# Altium PCB PCB1.PcbDoc
Units mm, origin at the board's own origin, x right, y up, seen from the top; angles counter-clockwise.
Board outline 80.1 x 60.2 mm, 2 copper layers (Top Layer, Bottom Layer); 47 components, 37 nets, 167 pads, 23 vias.
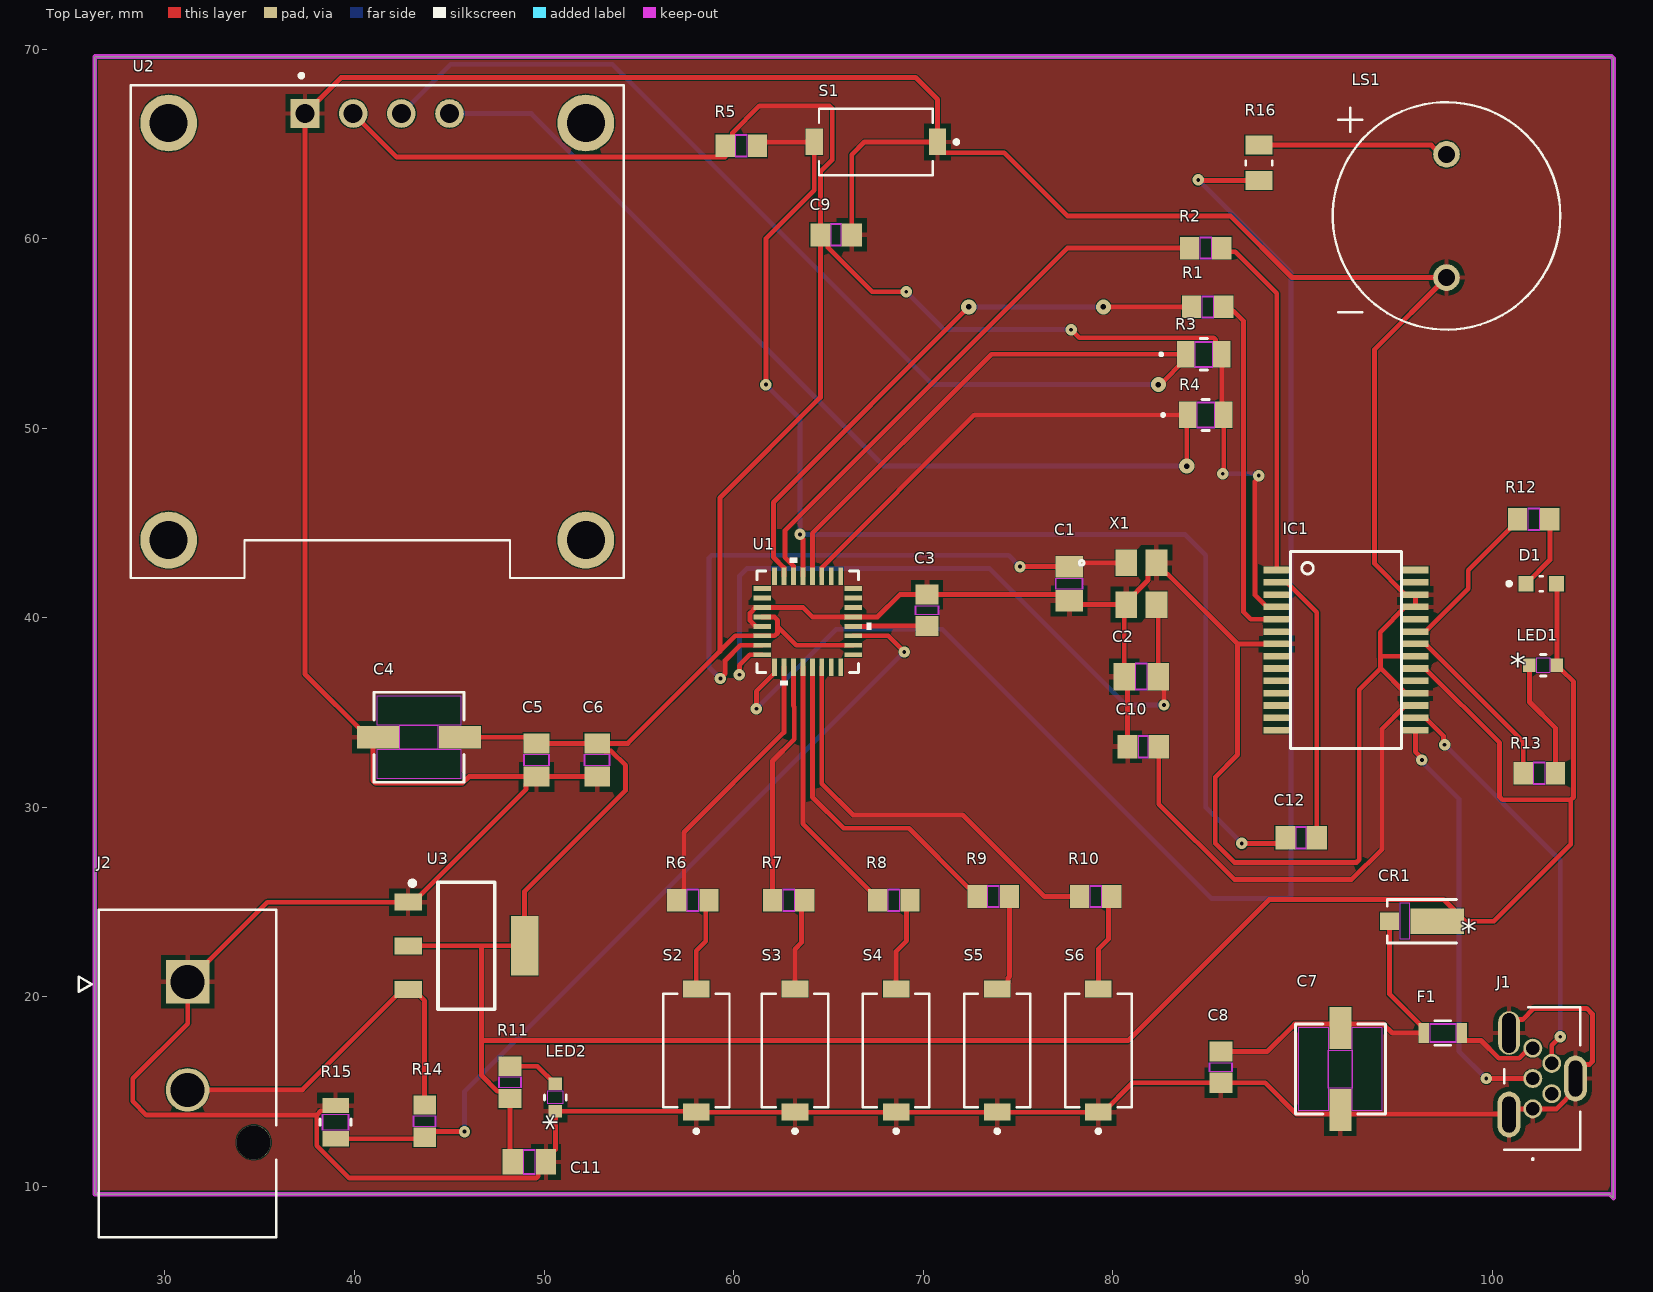
[diagram p0: Top Layer view]
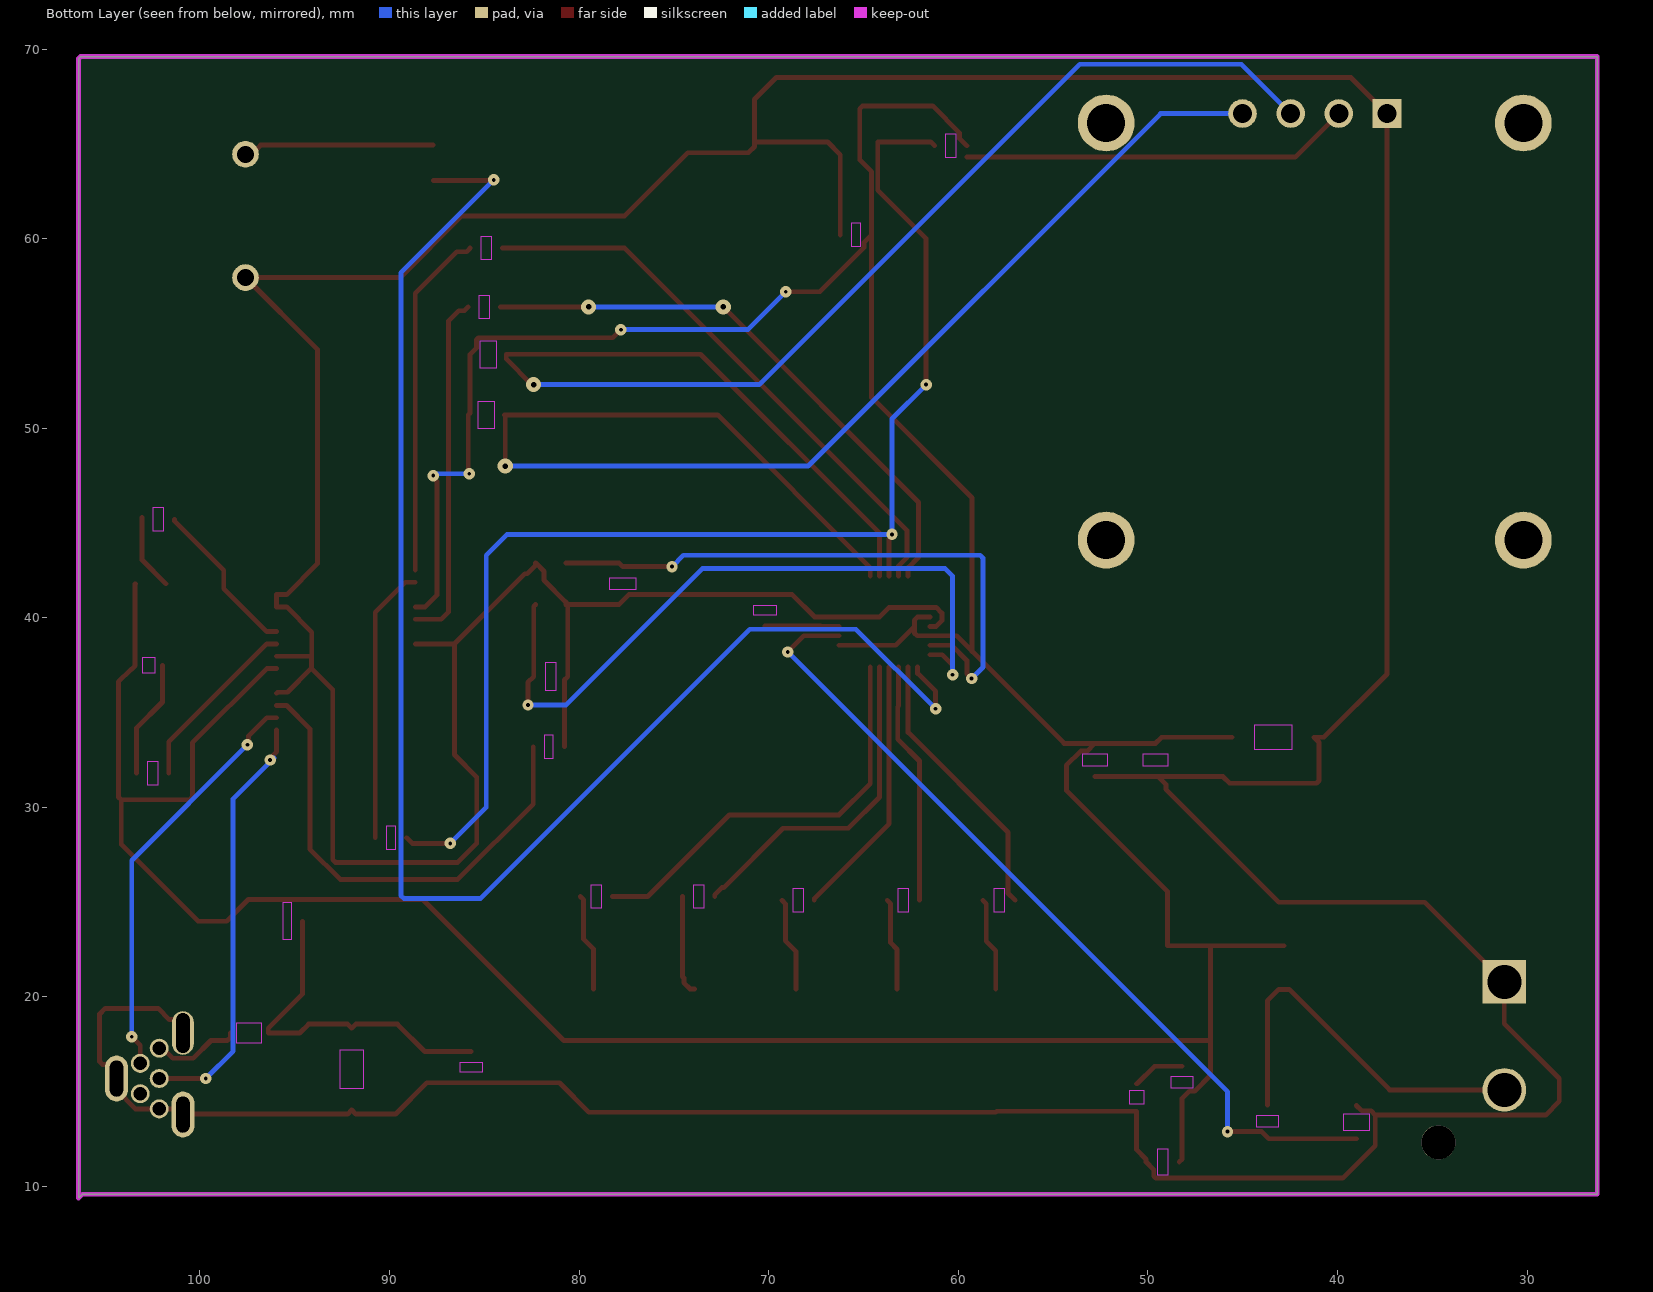
[diagram p1: Bottom Layer view, seen from below]
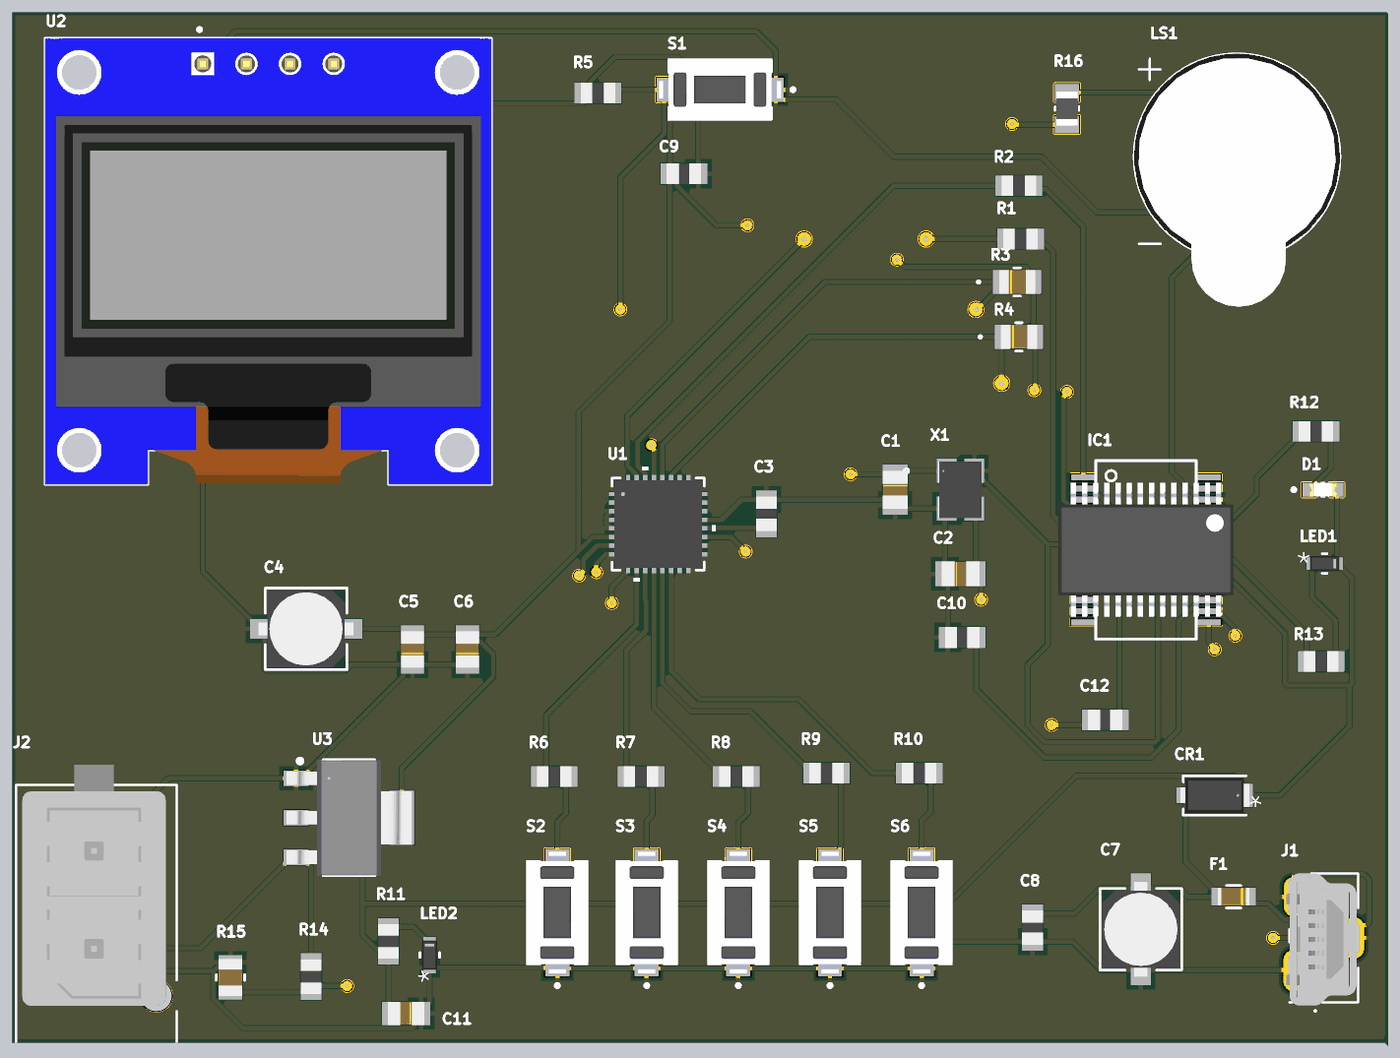
[diagram p2: 3D render of the assembled board from above, using the file's embedded part models]

## Layer stack, top to bottom
Top Solder: solder mask 0.0102, Solder Resist, Dk 3.5
Top Layer: signal copper 0.0356
Dielectric 1: dielectric 0.32, FR-4, Dk 4.8
Bottom Layer: signal copper 0.0356
Bottom Solder: solder mask 0.0102, Solder Resist, Dk 3.5

## Board outline
26.3,9.6 26.3,69.6 106.3,69.6 106.4,69.5 106.4,9.4 106.2,9.6

## Design rules (kind name [scope] priority, off if disabled: settings)
Clearance [All] p1: gap=0.05 ignorepadtopadclearanceinfootprint=FALSE
PolygonConnect [All] p1: connectstyle=Relief reliefconductorwidth=0.254 reliefentries=4 polygonreliefangle="90 Angle" airgapwidth=0.254
RoutingVias [All] p1: holewidth=0.711 width=1.27 viastyle="Through Hole" minholewidth=0.711 minwidth=1.27 maxholewidth=0.711 maxwidth=1.27
SolderMaskExpansion [All] p1: expansion=0.102 istentingtop=FALSE
Width [All] p1: maxlimit=0.254 minlimit=0.254 preferedwidth=0.254
30 further rules are at their usual default settings.

## Components (designator, comment, footprint, x,y, rotation, side; value= is the part's Value field where it differs from the comment)
C1 "CAP_18pfar_805pkg" CAP_CC0805_YAG 77.7,41.8 r270 top
C2 "CAP_18pfar_805pkg" CAP_CC0805_YAG 81.5,36.9 r0 top
C3 "100nF" CC0805N_YAG 70.2,40.4 r270 top
C4 "4.7uF" CAP_PAN_EEE_B_PAN 43.4,33.7 r180 top
C5 "1uF" CAP_CL21B105KAFNNNE_SAM 49.6,32.5 r90 top
C6 "1uF" CAP_CL21B105KAFNNNE_SAM 52.8,32.5 r90 top
C7 "3.7uF" CAP_PAN_EEE_B_PAN 92,16.2 r270 top
C8 "100nF" CC0805N_YAG 85.7,16.3 r90 top
C9 "100nF" CC0805N_YAG 65.4,60.2 r180 top
C10 "100nF" CC0805N_YAG 81.6,33.2 r0 top
C11 "1uF" CAP_CL21B105KAFNNNE_SAM 49.224,11.3 r180 top
C12 "100nF" CC0805N_YAG 89.925,28.4 r0 top
CR1 "SS1P3L-M384A" DIODE_SS1P3L-M384A_VIS 96.3,24 r180 top
D1 "Red" LED_150060RS75000 102.6,41.8 r0 top
F1 "MF-FSMF050X-2" FUSE_MF-FSMF050X_BRN 97.403,18.1 r180 top
IC1 "FT232RL-TUBE" SSOP28-LD 92.3,38.3 r270 top
J1 "1734753-1" CONN_1734753-1 102.65,15.7 r90 top
J2 "768290102" MOLEX_768290102 31.2,20.8 r180 top
LED1 "Green" LED_150060GS75000_WRE 102.7,37.5 r0 top
LED2 "Green" LED_150060GS75000_WRE 50.6,14.7 r90 top
LS1 "AT-1224-TWT-5V-2-R" XDCR_AT-1224-TWT-5V-2-R 97.6,61.2 r0 top
R1 "1K" RC0805N_YAG 85,56.4 r180 top
R2 "1K" RC0805N_YAG 84.9,59.5 r180 top
R3 "4.7K" RES_CRCW_0805_VIS 84.8,53.9 r0 top
R4 "4.7K" RES_CRCW_0805_VIS 84.9,50.7 r0 top
R5 "1K" RC0805N_YAG 60.4,64.9 r0 top
R6 "1K" RC0805N_YAG 57.851,25.1 r0 top
R7 "1K" RC0805N_YAG 62.9,25.1 r0 top
R8 "1K" RC0805N_YAG 68.451,25.1 r0 top
R9 "1K" RC0805N_YAG 73.7,25.3 r0 top
R10 "1K" RC0805N_YAG 79.092,25.3 r0 top
R11 "1K" RC0805N_YAG 48.2,15.5 r270 top
R12 "1K" RC0805N_YAG 102.2,45.2 r180 top
R13 "1K" RC0805N_YAG 102.5,31.8 r180 top
R14 "1K" RC0805N_YAG 43.7,13.449 r270 top
R15 "3K" RES_CRG0805_TEC 39,13.4 r270 top
R16 "220" RESC2012X65N 87.7,64 r270 top
S1 "PTS636_SM43J_SMTR_LFS" SW_PTS636_SM43J_SMTR_LFS 67.5,65.1 r180 top
S2 "PTS636_SM43J_SMTR_LFS" SW_PTS636_SM43J_SMTR_LFS 58.028,17.175 r90 top
S3 "PTS636_SM43J_SMTR_LFS" SW_PTS636_SM43J_SMTR_LFS 63.235,17.175 r90 top
S4 "PTS636_SM43J_SMTR_LFS" SW_PTS636_SM43J_SMTR_LFS 68.569,17.175 r90 top
S5 "PTS636_SM43J_SMTR_LFS" SW_PTS636_SM43J_SMTR_LFS 73.903,17.175 r90 top
S6 "PTS636_SM43J_SMTR_LFS" SW_PTS636_SM43J_SMTR_LFS 79.237,17.175 r90 top
U1 "ATMEGA328P-MUR" 32M1-A_ATM 63.9,39.8 r0 top
U2 "DM-OLED096-636" MODULE_DM-OLED096-636 41.2,55.1 r0 top
U3 "LM1117MPX-5.0NOPB" DCY0004A_L 45.9,22.7 r0 top
X1 "ABM8W-16.0000MHZ-8-K1Z-T3" XTAL4P_ABM8W_ABR 81.5,41.8 r0 top

## Footprints (in the part's own frame and the unit in brackets; to place one, negate y for a bottom-side part, rotate by r counter-clockwise, add the part's x,y. Pads: shape width x height; smd on the part's side, far side on the other; paste and mask are expansions set on the pad)
32M1-A_ATM [mil]
  rect 36x10 smd paste+0 mask+0: 1(-94.5,68.9) 2(-94.5,49.21) 3(-94.5,29.53) 4(-94.5,9.84) 5(-94.5,-9.84) 6(-94.5,-29.53) 7(-94.5,-49.21) 8(-94.5,-68.9) 17(94.5,-68.9) 18(94.5,-49.21) 19(94.5,-29.53) 20(94.5,-9.84) 21(94.5,9.84) 22(94.5,29.53) 23(94.5,49.21) 24(94.5,68.9)
  rect 10x36 smd paste+0 mask+0: 9(-68.9,-94.5) 10(-49.21,-94.5) 11(-29.53,-94.5) 12(-9.84,-94.5) 13(9.84,-94.5) 14(29.53,-94.5) 15(49.21,-94.5) 16(68.9,-94.5) 25(68.9,94.5) 26(49.21,94.5) 27(29.53,94.5) 28(9.84,94.5) 29(-9.84,94.5) 30(-29.53,94.5) 31(-49.21,94.5) 32(-68.9,94.5)
  silkscreen extent -106,-132 132,132, body extent -101,-101 101,101, height 65
CAP_CC0805_YAG [mil]
  rect 44x57 smd paste+0 mask+0: 1(-35.31,0) 2(35.31,0)
  Top Layer keep-out region: -11.31,-26.5 -11.31,26.5 11.31,26.5 11.31,-26.5
  Keep-Out Layer region: -11.31,-28.5 -11.31,28.5 11.31,28.5 11.31,-28.5
  body extent -43,-29 43,29, height 57
CAP_CL21B105KAFNNNE_SAM [mil]
  rect 42x53 smd paste+0 mask+0: 1(-34.5,0) 2(34.5,0)
  Top Layer keep-out region: -11.5,-24.5 -11.5,24.5 11.5,24.5 11.5,-24.5
  Keep-Out Layer region: -11.5,-26.5 -11.5,26.5 11.5,26.5 11.5,-26.5
  body extent -41,-26 41,26, height 53
CAP_PAN_EEE_B_PAN [mil]
  rect 87x46 smd paste+0 mask+0: 1(-85,0) 2(85,0)
  Top Layer keep-out region: -39.5,-25 -39.5,25 39.5,25 39.5,-25
  Top Layer keep-out region: -86.5,25 -86.5,86.5 86.5,86.5 86.5,25
  Top Layer keep-out region: -86.5,-86.5 -86.5,-25 86.5,-25 86.5,-86.5
  Keep-Out Layer region: -39.5,-25 -39.5,25 39.5,25 39.5,-25
  silkscreen extent -94,-94 94,94, body extent -109,-89 109,89, height 242
CC0805N_YAG [mil]
  rect 42x48 smd paste+0 mask+0: 1(-32.5,0) 2(32.5,0)
  Top Layer keep-out region: -9.5,-22 -9.5,22 9.5,22 9.5,-22
  Keep-Out Layer region: -9.5,-24 -9.5,24 9.5,24 9.5,-24
  body extent -39,-24 39,24, height 28
CONN_1734753-1 [mm]
  round 1 hole 0.7: 1(-1.6,0.5) 2(-0.8,-0.5) 3(0,0.5) 4(0.8,-0.5) 5(1.6,0.5)
  oval 2.416x1.208 hole 0.7 slot 1.9 at 0 deg: S1(-1.9,1.75) S3(0,-1.75)
  oval 2.3x1.15 hole 0.7 slot 2.1 at 0 deg: S2(2.4,1.75)
  silkscreen extent -4.3,-2 3.75,2, body extent -3.94,-1.91 3.76,2.19, height 8.81
DCY0004A_L [mm]
  rect 1.45x0.9 smd paste+0 mask+0.051: 1(-3.075,2.3) 2(-3.075,0) 3(-3.075,-2.3)
  rect 1.45x3.15 smd paste+0 mask+0.051: 4(3.075,0)
  silkscreen extent -2.97,-3.35 1.5,3.42, body extent -3.64,-3.35 3.64,3.35, height 1.81
DIODE_SS1P3L-M384A_VIS [mil]
  rect 111x53 smd paste+0 mask+0: 1(-31.5,0)
  rect 40x36 smd paste+0 mask+0: 2(67,0)
  Top Layer keep-out region: 26,-38 26,38 45,38 45,-38
  Keep-Out Layer region: 26,-38 26,38 45,38 45,-38
  silkscreen extent -72,-45 72,45, body extent -79,-40 79,40, height 45
FUSE_MF-FSMF050X_BRN [mil]
  rect 22x41 smd paste+0 mask+0: 1(-39.5,0) 2(39.5,0)
  Top Layer keep-out region: -26.5,-18.5 -26.5,18.5 26.5,18.5 26.5,-18.5
  Keep-Out Layer region: -26.5,-20.5 -26.5,20.5 26.5,20.5 26.5,-20.5
  silkscreen extent -16,-26 16,26, body extent -36,-21 36,21, height 39
LED_150060GS75000_WRE [mil]
  rect 26x28 smd paste+0 mask+0: 1(-28.5,0) 2(28.5,0)
  Top Layer keep-out region: -13.5,-15.5 -13.5,15.5 13.5,15.5 13.5,-15.5
  Keep-Out Layer region: -13.5,-15.5 -13.5,15.5 13.5,15.5 13.5,-15.5
  silkscreen extent -6,-22 6,22, body extent -34,-17 34,17, height 32
LED_150060RS75000 [mm]
  rect 0.8x0.8 smd: 1(-0.8,0) 2(0.8,0)
  silkscreen extent -1.8,-0.4 0.08,0.4, body extent -0.8,-0.4 0.8,0.4, height 0.7
MODULE_DM-OLED096-636 [mm]
  rect 1.508x1.508 / inner round 1.508 / far side rect 1.508x1.508 hole 1: 1(-3.81,11.5)
  round 1.508 hole 1: 2(-1.27,11.5) 3(1.27,11.5) 4(3.81,11.5)
  round 3 hole 2: S1(-11,11) S2(11,11) S3(11,-11) S4(-11,-11)
  silkscreen extent -13,-13 13,13.6, body extent -13,-13 13,13, height 5.66
MOLEX_768290102 [mm]
  rect 2.3x2.3 / inner round 2.3 / far side rect 2.3x2.3 hole 1.8 mask+0.076: 1(0,0)
  round 2.3 hole 1.8 mask+0.076: 2(0,5.7)
  round 1.8 hole 1.8 unplated mask+0.076: ""(-3.48,8.47)
  silkscreen extent -4.67,-3.81 5.75,13.47, body extent -4.03,-4.99 4.32,9.05, height 14.81
RC0805N_YAG [mil]
  rect 40x47 smd paste+0 mask+0: 1(-33.5,0) 2(33.5,0)
  Top Layer keep-out region: -11.5,-21.5 -11.5,21.5 11.5,21.5 11.5,-21.5
  Keep-Out Layer region: -11.5,-23.5 -11.5,23.5 11.5,23.5 11.5,-23.5
  body extent -39,-24 39,24, height 28
RES_CRCW_0805_VIS [mil]
  rect 36x55 smd paste+0 mask+0: 1(-37.5,0) 2(37.5,0)
  Top Layer keep-out region: -17.5,-25.5 -17.5,25.5 17.5,25.5 17.5,-25.5
  Keep-Out Layer region: -17.5,-27.5 -17.5,27.5 17.5,27.5 17.5,-27.5
  silkscreen extent -91,-32 7,32, body extent -41,-27 41,27, height 24
RES_CRG0805_TEC [mil]
  rect 32x55 smd paste+0 mask+0: 1(-34.5,0) 2(34.5,0)
  Top Layer keep-out region: -16.5,-25.5 -16.5,25.5 16.5,25.5 16.5,-25.5
  Keep-Out Layer region: -16.5,-27.5 -16.5,27.5 16.5,27.5 16.5,-27.5
  silkscreen extent -6,-32 6,32, body extent -43,-27 43,27, height 26
RESC2012X65N [mm]
  rect 1x1.42 smd: 1(-0.935,0) 2(0.935,0)
  silkscreen extent -0.12,-0.7 0.12,0.7, body extent -1,-0.63 1,0.63, height 0.66
SSOP28-LD [mm]
  rect 0.348x1.397 smd: 1(-4.225,-3.656) 2(-3.575,-3.656) 3(-2.925,-3.656) 4(-2.275,-3.656) 5(-1.625,-3.656) 6(-0.975,-3.656) 7(-0.325,-3.656) 8(0.325,-3.656) 9(0.975,-3.656) 10(1.625,-3.656) 11(2.275,-3.656) 12(2.925,-3.656) 13(3.575,-3.656) 14(4.225,-3.656) 15(4.225,3.656) 16(3.575,3.656) 17(2.925,3.656) 18(2.275,3.656) 19(1.625,3.656) 20(0.975,3.656) 21(0.325,3.656) 22(-0.325,3.656) 23(-0.975,3.656) 24(-1.625,3.656) 25(-2.275,3.656) 26(-2.925,3.656) 27(-3.575,3.656) 28(-4.225,3.656)
  silkscreen extent -5.2,-2.93 5.2,2.93, body extent -3.9,-5.1 3.9,5.1, height 2
SW_PTS636_SM43J_SMTR_LFS [mm]
  rect 0.9x1.4 smd: 1(-3.25,0) 2(3.25,0)
  silkscreen extent -4.35,-1.75 3,1.75, body extent -3.55,-1.75 3.55,1.75, height 4.31
XDCR_AT-1224-TWT-5V-2-R [mm]
  round 1.408 hole 0.9: N(0,-3.25) P(0,3.25)
  silkscreen extent -6,-6 6,6, body extent -6,-8.73 6,6.01, height 9.06
XTAL4P_ABM8W_ABR [mm]
  rect 1.143x1.397 smd paste+0 mask+0: 1(-0.8,1.1) 2(-0.8,-1.1) 3(0.8,-1.1) 4(0.8,1.1)
  silkscreen extent -3.27,0.97 -3.02,1.23, body extent -1.3,-1.65 1.3,1.65, height 0.81

## Part data
C1 C2: "No Description Available", Mfr_Name=Yageo
C3 C8 C9 C10 C12: library part CC0805KRX7R9BB104, "No Description Available", Mfr_Name=Yageo
C4 C7: library part EEE-HA1E4R7R, "No Description Available", Mfr_Name=Panasonic
C5 C6 C11: library part CL21B105KAFNNNE, "No Description Available", Mfr_Name=Samsung
CR1: "No Description Available", Mfr_Name=Vishay, RefDes=RefDes, Type=Type
D1: library part 150060RS75000, Package=None, Availability=Unavailable, MP=150060RS75000, Price=None
F1: "No Description Available", Mfr_Name="Bourns Electronics"
IC1: "USB Bridge, USB to UART USB 2.0 UART Interface 28-SSOP", Package="SSOP-28 FTDI", Check_prices=https://www.snapeda.com/parts/FT232RL-TUBE/FTDI%252C+Future+Technology+Devices+International+Ltd/view-part/?ref=eda, Digi-Key_Part_Number=768-1306-ND, MF=FTDI,, MP=FT232RL-TUBE, Purchase-URL=https://pricing.snapeda.com/search/part/FT232RL-TUBE/?ref=eda, SnapEDA_Link=https://www.snapeda.com/parts/FT232RL-TUBE/FTDI%252C+Future+Technology+Devices+International+Ltd/view-part/?ref=snap
J1: "Conn Mini USB 2.0 Type B RCP 5 POS 0.8mm Solder ST Thru-Hole 5 Terminal 1 Port Box/Tray", Package=None, Availability="In Stock", Centerline_Pitch=".8 mm[.031 in]", Check_prices=https://www.snapeda.com/parts/1734753-1/TE+Connectivity+AMP+Connectors/view-part/?ref=eda, EU_RoHS_Compliance=Compliant, MF="TE Connectivity", MP=1734753-1, Number_of_Positions=5, Price=None, Product_Type=Connector, Purchase-URL=https://pricing.snapeda.com/search/part/1734753-1/?ref=eda, SnapEDA_Link=https://www.snapeda.com/parts/1734753-1/TE+Connectivity+AMP+Connectors/view-part/?ref=snap
J2: Package=None, Availability=Unavailable, MP=768290102, Price=None
LED1 LED2: library part 150060GS75000, "No Description Available", Mfr_Name="Wurth Electronics"
LS1: "AUDIO TRANSDUCER 12 VP-P 85 DB 2400 HZ", Package=None, Availability=Unavailable, MP=AT-1224-TWT-5V-2-R, Price=None
R1 R2 R5 R6 R7 R8 R9 R10 R11 R12 R13 R14: library part RC0805FR-071KL, "No Description Available", Mfr_Name=Yageo
R3 R4: library part CRCW08054K70FKEAC, "No Description Available", Mfr_Name=Vishay
R15: library part CRG0805F3K0, "No Description Available", Mfr_Name="TE Connectivity"
R16: library part CRGCQ0805F220R, "Fixed Resistor CRGCQ 0805 220R 1%", Package="2012 TE Connectivity", Digi-Key_Part_Number=A129741CT-ND, DigiKey-Purchase-URL=https://snapeda.com/shop?store=DigiKey&id=3188284, MF="TE Connectivity", Mouser-Purchase-URL=https://snapeda.com/shop?store=Mouser&id=3188284, MP=CRGCQ0805F220R, SnapEDA_Link=https://www.snapeda.com/parts/CRGCQ0805F220R/TE%20Connectivity%20Passive%20Product/view-part/3188284/?ref=snap
S1 S2 S3 S4 S5 S6: "Tactile Switch SPST-NO Top Actuated Surface Mount", Package=None, Availability=Unavailable, MP=PTS636_SM43J_SMTR_LFS, Price=None
U1: "No Description Available", Mfr_Name=Microchip, RefDes=RefDes, Type=Type
U2: "0.96â€ 128 X 64 MONOCHROME GRAPHIC OLED DISPLAY MODULE - I2C", Package=Package, Check_prices=https://www.snapeda.com/parts/DM-OLED096-636/Display+Module/view-part/?ref=eda, MF="Display Module", MP=DM-OLED096-636, SnapEDA_Link=https://www.snapeda.com/parts/DM-OLED096-636/Display+Module/view-part/?ref=snap
U3: "No Description Available", Mfr_Name="Texas Instruments", RefDes=RefDes, Type=TYPE
X1: "No Description Available", Mfr_Name=Abracon, RefDes=RefDes, Type=Crystals

## Via types
v1: diameter 0.6, hole 0.2, Top Layer to Bottom Layer, 19 vias
v2: diameter 0.8, hole 0.3, Top Layer to Bottom Layer, 4 vias

## Nets (pads, with @x,y where several pads share a name; then routed paths per layer and width w, separated by ;. In a path a pad name is that pad's centre, name@x,y a point inside that pad or via, vN(x,y) a via of type N, cw(c..) or ccw(c..) an arc to the next point about the centre after c; other vN are vias at no path point)
3.3: C10.2 IC1.17 | length 25.7
  Top Layer w0.254: C10.2 82.425,30.175 86.4,26.2 92.6,26.2 94.2,27.8 94.2,34.143 95.432,35.375 IC1.17
+5: C4.1 C5.2 C6.2 C9.2 C11.2 CR1.1 D1.2 IC1.4 IC1.20 LED1.2 R3.2 R4.2 R5.1 R11.2 U1.4 U1.6 U1.18 U2.2 U3.2 U3.4 | length 245.7
  Top Layer w0.254: U2.2 42.23,64.3 59.549,64.3 ; U3.2 46.7,22.7 ; C4.1 49.276,33.7 C5.2 C6.2 ; C11.2 48.2,11.447 R11.2 47.819,15.03 47.531,15.03 46.7,15.861 46.7,17.7 ; R5.1 59.93,65.281 59.93,65.569 61.361,67 65.051,67 65.2,66.851 65.2,64.154 64.575,63.529 C9.2 ; U1.4 62.146,40.05 62.32,39.876 62.32,39.537 ; U1.18 63.307,38.55 62.32,39.537 ; v1(69.1,57.2) 67.299,57.2 64.981,59.518 64.981,59.794 C9.2 ; v1(77.8,55.2) 78.224,54.775 85.318,54.775 85.422,54.671 85.422,54.23 R3.2 85.753,50.8 R4.2 85.853,47.652 v1(85.8,47.6) ; v1(87.7,47.5) 87.7,47.406 87.5,47.206 87.5,41.194 88.12,40.575 IC1.4 ; IC1.20 96.481,37.325 100.4,33.406 100.4,30.549 100.549,30.4 104.151,30.4 ; D1.2 103.424,41.776 103.424,37.475 103.627,37.271 103.653,37.271 104.3,36.624 104.3,30.549 104.151,30.4 ; 46.7,17.7 80.8,17.7 88.242,25.142 97.458,25.142 98.6,24 100.1,24 104.151,28.051 104.151,30.4 ; 46.7,17.7 46.7,22.7 ; 46.7,22.7 U3.4 48.975,25.575 54.3,30.9 54.3,32.216 53.546,32.97 53.206,32.97 C6.2 ; C6.2 54.421,33.376 59.272,38.228 ; 59.272,38.228 60.095,39.05 U1.6 62.171,39.05 62.32,39.199 62.32,39.537 ; 59.272,38.228 59.272,46.321 64.575,51.624 C9.2
  Bottom Layer w0.254: v1(69.1,57.2) 71.1,55.2 v1(77.8,55.2) ; v1(85.8,47.6) 87.6,47.6 v1(87.7,47.5)
AREF: C3.2 U1.20 | length 3.9
  Top Layer w0.254: U1.20 67.251,39.55 67.276,39.575 C3.2
BTN1: R6.1 U1.10 | length 14.6
  Top Layer w0.254: R6.1 57.381,25.481 57.381,28.685 62.65,33.954 U1.10
BTN2: R7.1 U1.11 | length 12.8
  Top Layer w0.254: R7.1 62.049,32.449 63.2,33.6 63.2,35.31 63.15,35.36 U1.11
BTN3: R8.1 U1.12 | length 13.9
  Top Layer w0.254: U1.12 63.65,29.139 67.6,25.189 R8.1
BTN4: R9.1 U1.13 | length 17.8
  Top Layer w0.254: U1.13 64.15,30.55 65.8,28.9 69.249,28.9 72.379,25.77 72.468,25.77 72.849,25.389 R9.1
BTN5: R10.1 U1.14 | length 22.2
  Top Layer w0.254: U1.14 64.65,31.25 66.3,29.6 72.08,29.6 76.38,25.3 R10.1
Buzzer: R16.2 U1.9 | length 81.5
  Top Layer w0.254: v1(61.2,35.2) 61.2,36.119 62.15,37.069 U1.9 ; v1(84.5,63.1) 84.535,63.065 R16.2
  Bottom Layer w0.254: v1(61.2,35.2) 65.4,39.4 71,39.4 85.2,25.2 89.251,25.2 89.4,25.349 89.4,58.2 v1(84.5,63.1)
DVBAT: R14.2 R15.2 U1.19 | length 44.9
  Top Layer w0.254: R15.2 43.626,12.524 R14.2 44.002,12.9 v1(45.8,12.9) ; U1.19 68.15,39.05 v1(69,38.2)
  Bottom Layer w0.254: v1(45.8,12.9) 45.8,15 v1(69,38.2)
GND: C1.2 C2.1 C3.1 C4.2 C5.1 C6.1 C7.2 C8.1 C9.1 C10.1 C11.1 IC1.7 IC1.18 IC1.21 IC1.25 IC1.26 J1.1 J1.S1 J1.S2 J1.S3 J2.1 LED2.1 LS1.N R15.1 S1.1 S2.1 S3.1 S4.1 S5.1 S6.1 U1.3 U1.5 U1.21 U2.1 U3.1 X1.2 X1.4 | length 349.2
  Top Layer w0.254: R15.1 38.721,13.997 38.281,13.997 38.228,13.996 38.005,13.773 ; C6.1 C5.1 C5.1@49.46,31.624 ; U1.5 61.169,39.55 60.99,39.73 60.986,39.73 60.865,39.85 60.865,40.25 61.165,40.55 63.65,40.55 64.15,40.05 U1.21 67.586,40.05 68.762,41.226 C3.1 77.378,41.226 C1.2 77.903,40.7 X1.2 ; C9.1 66.226,64.426 66.9,65.1 S1.1 ; C10.1 80.774,36.729 C2.1 80.603,40.603 X1.2 ; IC1.7 86.575,38.625 ; IC1.18 95.909,36.072 95.385,36.072 94.12,37.336 ; IC1.21 94.12,37.975 ; J1.S2 100.9,18.396 101.314,18.809 101.609,18.809 102.2,19.4 105,19.4 105.3,19.1 105.3,16.6 105.144,16.444 104.841,16.444 104.4,16.004 104.4,15.096 103.404,14.1 J1.1 101.2,14.1 J1.S1 100.874,13.826 92.215,13.826 C7.2 91.785,13.826 89.687,13.826 88.038,15.475 C8.1 81.036,15.475 79.487,13.925 S6.1 S5.1 S4.1 S3.1 S2.1 57.977,13.976 LED2.1 50.6,11.94 50.1,11.44 C11.1 49.694,10.894 49.694,10.554 49.589,10.45 39.719,10.45 38.005,12.163 38.005,13.773 ; 38.005,13.773 29.027,13.773 28.3,14.5 28.3,15.7 31.2,18.6 J2.1 35.4,25 U3.1 43.1,25 49.054,30.954 49.054,31.217 C5.1@49.46,31.624 ; C5.1@49.46,31.624 46.039,31.624 45.691,31.276 41.109,31.276 40.976,31.409 40.976,33.435 C4.2 40.72,33.7 37.39,37.03 U2.1 39.29,68.5 69.6,68.5 70.75,67.35 S1.1 ; S1.1 70.75,64.85 71.073,64.527 74.273,64.527 77.6,61.2 86.2,61.2 89.45,57.95 LS1.N 93.805,54.155 93.805,42.851 95.432,41.225 IC1.26 IC1.25 95.432,40.575 94.1,39.243 94.1,37.975 94.12,37.975 ; X1.2 80.7,40.827 81.856,41.983 81.856,42.456 X1.4 82.3,42.773 82.745,42.329 82.872,42.329 86.575,38.625 ; 86.575,38.625 86.575,32.775 85.4,31.6 85.4,28.1 86.4,27.1 92.851,27.1 93,27.249 93,36.216 94.12,37.336 ; 94.12,37.336 94.12,37.975
NetC12_2: C12.2 IC1.2 | length 14.7
  Top Layer w0.254: IC1.2 89.169,41.875 90.751,40.293 C12.2
NetD1_1: D1.1 R12.1 | length 4
  Top Layer w0.254: D1.1 103.051,43.051 R12.1 R12.1@103.051,45.289
NetF1_1: F1.1 J1.5 | length 4.7
  Top Layer w0.254: F1.1 98.407,17.859 98.559,17.706 99.419,17.706 100.352,16.773 101.431,16.773 101.958,17.3 J1.5
NetIC1_15: IC1.15 J1.3 | length 22.6
  Top Layer w0.254: IC1.15 95.956,32.938 96.3,32.594 v1(96.3,32.5) ; v1(99.7,15.7) J1.3
  Bottom Layer w0.254: v1@96.1,32.6 98.253,30.447 98.253,17.147 v1(99.7,15.7)
NetIC1_16: IC1.16 J1.4 | length 21.9
  Top Layer w0.254: IC1.16 96.481,34.725 97.434,33.772 97.434,33.366 v1(97.5,33.3) ; J1.4 103.15,17.45 v1(103.6,17.9)
  Bottom Layer w0.254: v1(97.5,33.3) 103.6,27.2 v1(103.6,17.9)
NetIC1_22: IC1.22 R13.2 | length 9.5
  Top Layer w0.254: IC1.22 96.481,38.625 101.649,33.456 R13.2
NetIC1_23: IC1.23 R12.2 | length 8.5
  Top Layer w0.254: IC1.23 96.481,39.275 98.748,41.542 98.748,42.51 101.349,45.111 R12.2
NetLED1_1: LED1.1 R13.1 | length 6.3
  Top Layer w0.254: LED1.1 101.976,35.56 103.351,34.185 R13.1
NetLED2_2: LED2.2 R11.1 | length 2.8
  Top Layer w0.254: R11.1 49.648,16.351 50.575,15.424 LED2.2
NetLS1_P: LS1.P R16.1 | length 10.1
  Top Layer w0.254: R16.1 96.803,64.935 97.288,64.45 LS1.P
NetR1_2: R1.2 U1.31 | length 30.4
  Top Layer w0.254: U1.31 62.65,42.65 62.1,43.2 62.1,46.1 v2(72.4,56.4) ; v2(79.5,56.4) R1.2
  Bottom Layer w0.254: v2(72.4,56.4) v2(79.5,56.4)
NetR2_2: R2.2 U1.30 | length 30.1
  Top Layer w0.254: U1.30 63.15,42.75 62.7,43.2 62.7,44.6 77.6,59.5 R2.2
NetR6_2: R6.2 S2.2 | length 5
  Top Layer w0.254: S2.2 58.028,22.441 58.524,22.937 58.524,24.922 R6.2
NetR7_2: R7.2 S3.2 | length 4.9
  Top Layer w0.254: S3.2 63.235,22.52 63.573,22.858 63.573,24.922 R7.2
NetR8_2: R8.2 S4.2 | length 5
  Top Layer w0.254: S4.2 68.569,22.412 69.124,22.967 69.124,24.922 R8.2
NetR9_2: R9.2 S5.2 | length 5.3
  Top Layer w0.254: S5.2 74.153,20.425 74.476,20.748 74.476,20.998 74.551,21.073 R9.2
NetR10_2: R10.2 S6.2 | length 5.2
  Top Layer w0.254: S6.2 79.237,22.525 79.765,23.053 79.765,25.122 R10.2
RESET: C12.1 R5.2 S1.2 U1.29 | length 68.1
  Top Layer w0.254: R5.2 61.451,65.1 S1.2 64.25,62.55 61.7,60 v1(61.7,52.3) ; v1(63.5,44.4) 63.5,44.306 63.65,44.156 U1.29 ; v1(86.8,28.1) 88.8,28.1 C12.1
  Bottom Layer w0.254: v1(61.7,52.3) 63.5,50.5 v1(63.5,44.4) 83.8,44.4 84.9,43.3 84.9,30 v1(86.8,28.1)
RX: IC1.1 R2.1 | length 18.5
  Top Layer w0.254: R2.1 85.94,59.311 86.451,59.311 88.644,57.118 IC1.1
SCL: R3.1 U1.28 U2.3 | length 76.1
  Top Layer w0.254: U1.28 64.15,44.45 73.6,53.9 R3.1 83.848,53.659 82.489,52.3 v2(82.4,52.3)
  Bottom Layer w0.254: U2.3 45.07,69.2 53.6,69.2 70.5,52.3 v2(82.4,52.3)
SDA: R4.1 U1.27 U2.4 | length 72.4
  Top Layer w0.254: U1.27 64.65,42.65 72.7,50.7 R4.1 83.9,50.652 v2(83.9,48)
  Bottom Layer w0.254: U2.4 49.328,66.6 67.928,48 v2(83.9,48)
TX: IC1.5 R1.1 | length 18.6
  Top Layer w0.254: R1.1 86.051,56.2 86.351,56.2 86.9,55.651 86.9,40.3 87.275,39.925 IC1.5
VIN: J2.2 R14.1 U3.3 | length 20.4
  Top Layer w0.254: J2.2 37.25,15.1 42.55,20.4 U3.3 43.1,20.4 43.7,19.8 R14.1
VUSB: C7.1 C8.2 CR1.2 F1.2 | length 18.3
  Top Layer w0.254: C8.2 88.138,17.126 89.587,18.574 91.785,18.574 C7.1 92.215,18.574 94.27,18.574 94.745,18.1 F1.2 96.4,18.341 94.598,20.143 CR1.2
XTAL1: C1.1 U1.7 X1.1 | length 32
  Top Layer w0.254: v1@59.5,37 59.55,37.05 59.55,37.75 60.35,38.55 U1.7 ; v1(75.1,42.7) 77.697,42.7 C1.1 77.903,42.9 X1.1
  Bottom Layer w0.254: v1(59.3,36.8) 58.7,37.4 58.7,43.151 58.849,43.3 74.5,43.3 v1(75.1,42.7)
XTAL2: C2.2 U1.8 X1.3 | length 37.8
  Top Layer w0.254: v1(60.3,37) 60.3,37.5 60.85,38.05 U1.8 ; X1.3 82.397,40.603 C2.2 82.7,36.597 v1(82.7,35.4)
  Bottom Layer w0.254: v1(60.3,37) 60.3,42.2 60.7,42.6 73.5,42.6 80.7,35.4 v1@82.4,35.4
pads on no net: IC1.3 IC1.6 IC1.8 IC1.9 IC1.10 IC1.11 IC1.12 IC1.13 IC1.14 IC1.19 IC1.24 IC1.27 IC1.28 J1.2 J2. U1.1 U1.2 U1.15 U1.16 U1.17 U1.22 U1.23 U1.24 U1.25 U1.26 U1.32 U2.S1 U2.S2 U2.S3 U2.S4

## Polygon pours and split planes (outlines as drawn)
GND on Top Layer "NONET_L-01_P-001" (solid, pour order 0): 26.3,69.5 26.4,69.6 106.3,69.6 106.3,9.6 106.1,9.8 26.3,9.8

## Keep-outs
Keep-Out Layer:
  the board outline again, w0.254

## Text inside footprints (layer, text, board x,y; h text height)
CR1: Top Overlay "*" at 99.208,24.635 h1.27 r180; Mechanical 13 "*" at 98.065,24.635 h1.27 r180
J2: Mechanical 13 "PTH D1.8 +/- 0.05" at 37,30.015 h0.5 r180; Mechanical 13 "NPTH D1.8 +/- 0.05" at 37,31.285 h0.5 r180
LED1: Top Overlay "*" at 100.947,36.865 h1.27; Mechanical 13 "*" at 101.786,36.865 h1.27
LED2: Top Overlay "*" at 51.235,12.947 h1.27 r90; Mechanical 13 "*" at 51.235,13.786 h1.27 r90
U1: Mechanical 13 "*" at 61.639,41.165 h1.27